# EAGLE board xiao-backpack-template (EAGLE 9.7.0)
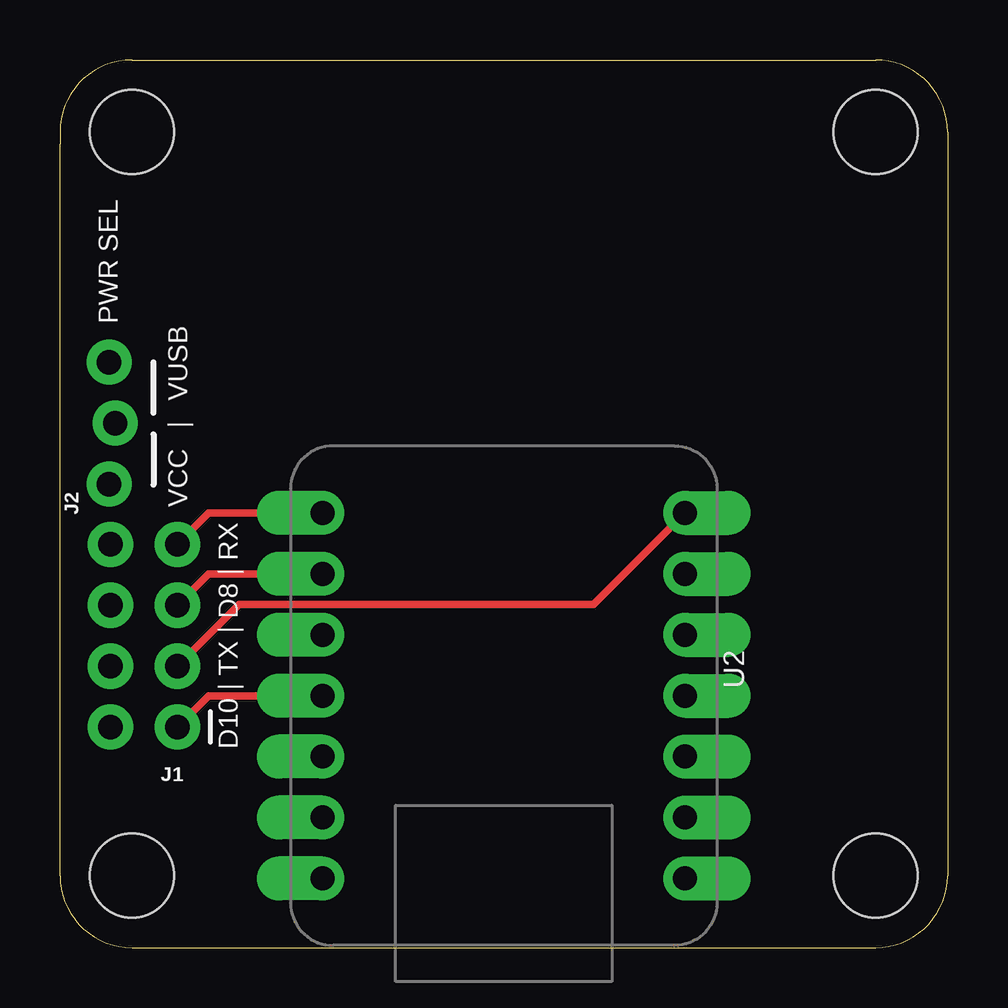
[diagram p0: board, top side]
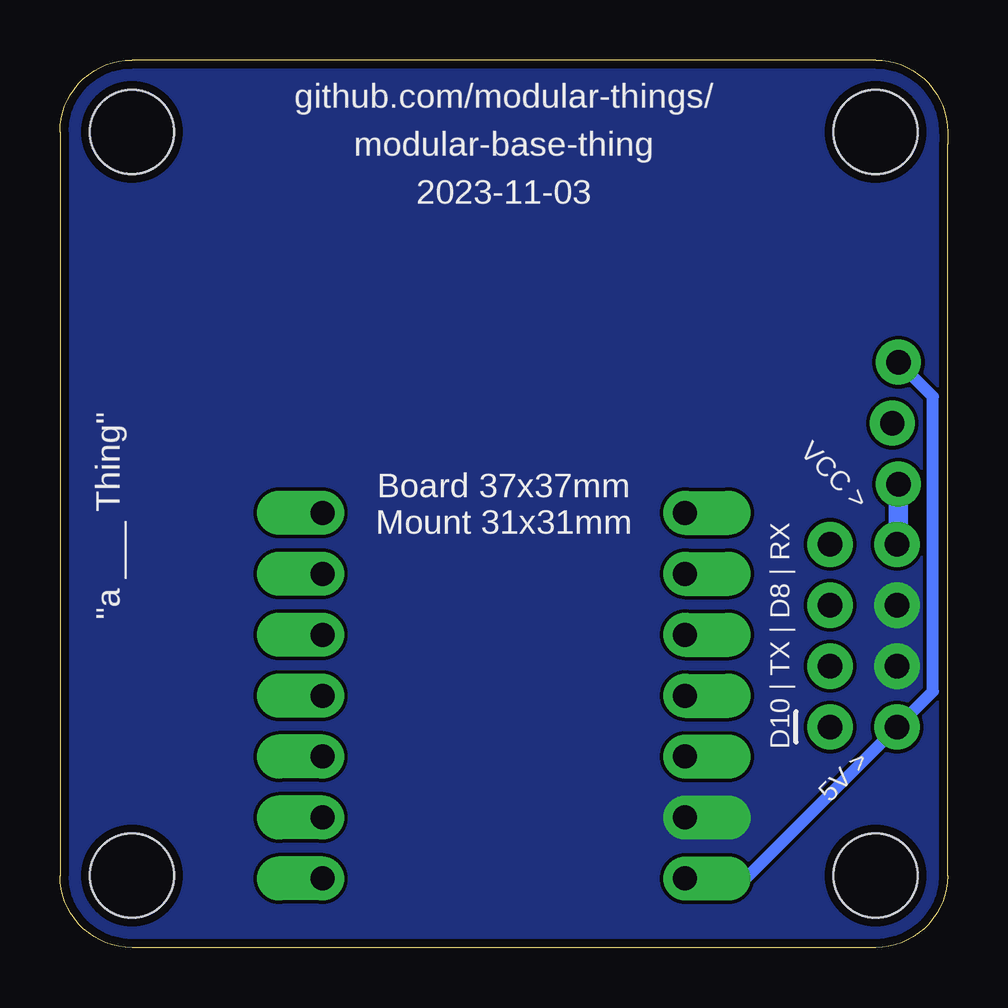
[diagram p1: board, bottom side, seen from below]

Size 37 x 37 mm. Coordinates in mm from the lower left corner, seen from the top.
Outline: 0,3 0,33.5 0,34 arc-90 3,37 34,37 arc-90 37,34 37,3 arc-90 34,0 3,0 arc-90 0,3
Copper layers (1*16): Top 0.035mm / dielectric 1.5mm / Bottom 0.035mm
Design rules "default *": minimum track width 8mil, minimum drill 0.25mm, track to track 6mil, track to pad 6mil, pad to pad 6mil, via to via 6mil, smd to smd 0mil, copper to edge 14mil, drill to drill 17mil, minimum pad ring 10mil, minimum via ring 8mil, stop-mask expansion 4mil, vias tented up to drill 60mil, thermal gap 8mil
Holes 3.5 mm at 34,3 3,3 3,34 34,34

## Footprints (pad centres in the part's own frame; a part is rotated, then mirrored left to right if it is on the bottom)
2X4-LOCK = drill 1.016 pad 1.88: 1 -1.397,3.81; 2 1.397,3.81; 3 -1.397,1.27; 4 1.397,1.27; 5 -1.397,-1.27; 6 1.397,-1.27; 7 -1.397,-3.81; 8 1.397,-3.81
1X03_LOCK_NO_SILK = drill 1.016 pad 1.88: 1 0,0.127; 2 2.54,-0.127; 3 5.08,0.127
MOUDLE14P-2.54-21X17.8MM = drill 1 pad 1.829 offset: 1 7.62,7.556; 2 5.08,7.556; 3 2.54,7.556; 4 0,7.556; 5 -2.54,7.556; 6 -5.08,7.556; 7 -7.62,7.556; 8 -7.62,-7.556; 9 -5.08,-7.556; 10 -2.54,-7.556; 11 0,-7.556; 12 2.54,-7.556; 13 5.08,-7.556; 14 7.62,-7.556

## Placement (x,y rotation side)
J1  CONN_2X4LOCK  [2X4-LOCK]  3.5,13 180 top
J2  [1X03_LOCK_NO_SILK]  2.17,19.32 90 top
U2  [MOUDLE14P-2.54-21X17.8MM]  18.5,10.5 270 top

## Library data of the parts
J1 J2 = jrr_connector
U2 = xiao

## Nets
+3V3: U2.12
+5V: J1.2 J2.3 U2.14
B_D8: J1.5 U2.9
B_D10: J1.1 U2.11
B_RX: J1.7 U2.8
B_TX: J1.3 U2.7
BP_VCC: J1.8 J2.1
GND: J1.4 J1.6 U2.13
VCC: J2.2

## Tracks (layer width: path | path; a pad name or v marks a point on that pad's centre or on a via)
+5V
  Bottom 0.508: U2.14 8.41,2.88 J1.2 0.61,10.68 0.61,22.96 J2.3
B_D8
  Top 0.305: U2.9 6.21,15.58 J1.5
B_D10
  Top 0.305: U2.11 6.21,10.5 J1.1
B_RX
  Top 0.305: U2.8 6.21,18.12 J1.7
B_TX
  Top 0.305: J1.3 7.47,14.3 22.24,14.3 U2.7
BP_VCC
  Bottom 0.508: 2.05,16.86 J1.8
  Bottom 0.813: J2.1 2.05,16.86
GND
  pour Bottom (rank 3, no thermals): -0.92,-0.92 37.92,-0.92 37.92,37.92 -0.92,37.92

## Text on the board
tPlace: PWR SEL | VUSB | | | VCC | D10 | TX | D8 | RX
bPlace: github.com/modular-things/ | modular-base-thing | 2023-11-03 | VCC > | Board 37x37mm / Mount 31x31mm | "a ___ Thing" | D10 | TX | D8 | RX | 5V >